# Altium PCB sustentationAvecPC.PcbDoc
Units mil, origin at the board's own origin, x right, y up, seen from the top; angles counter-clockwise.
Board outline 6300 x 3950 mil, 3 copper layers (Top Layer, Mid-Layer 1, Bottom Layer); 30 components, 24 nets, 106 pads, 0 vias.
Unrouted connection lines stored in the file: 68.
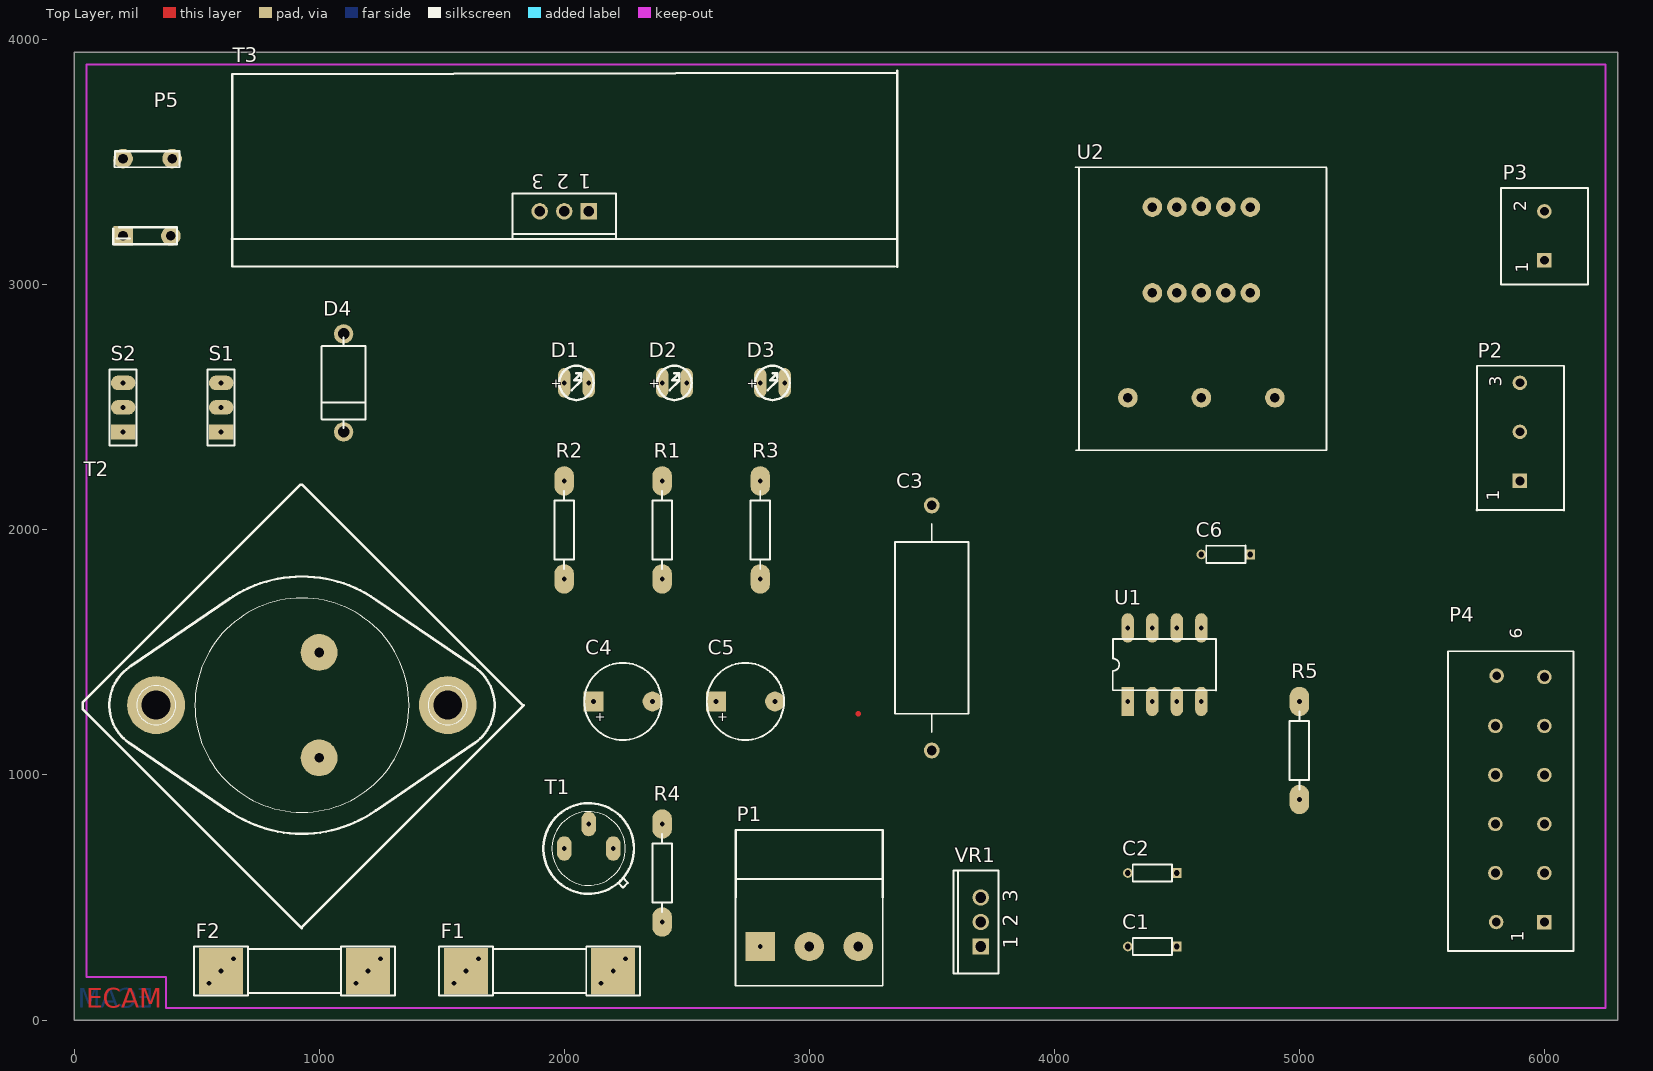
[diagram p0: Top Layer view]
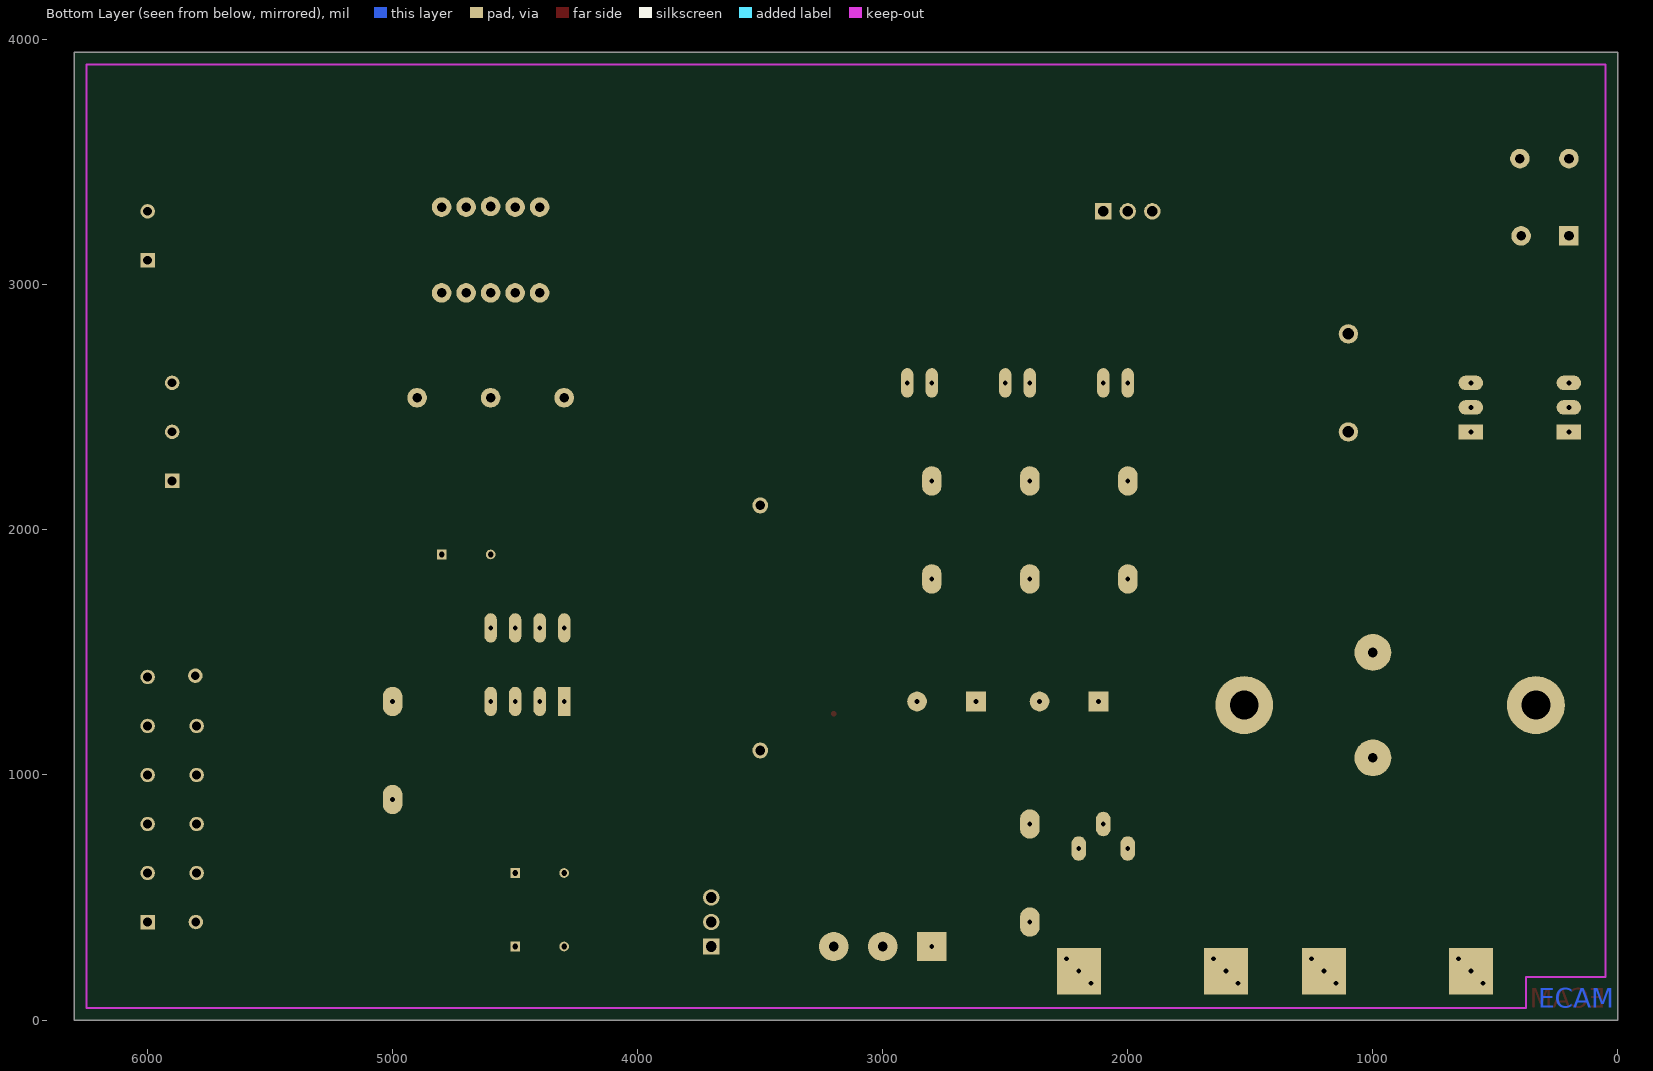
[diagram p1: Bottom Layer view, seen from below]
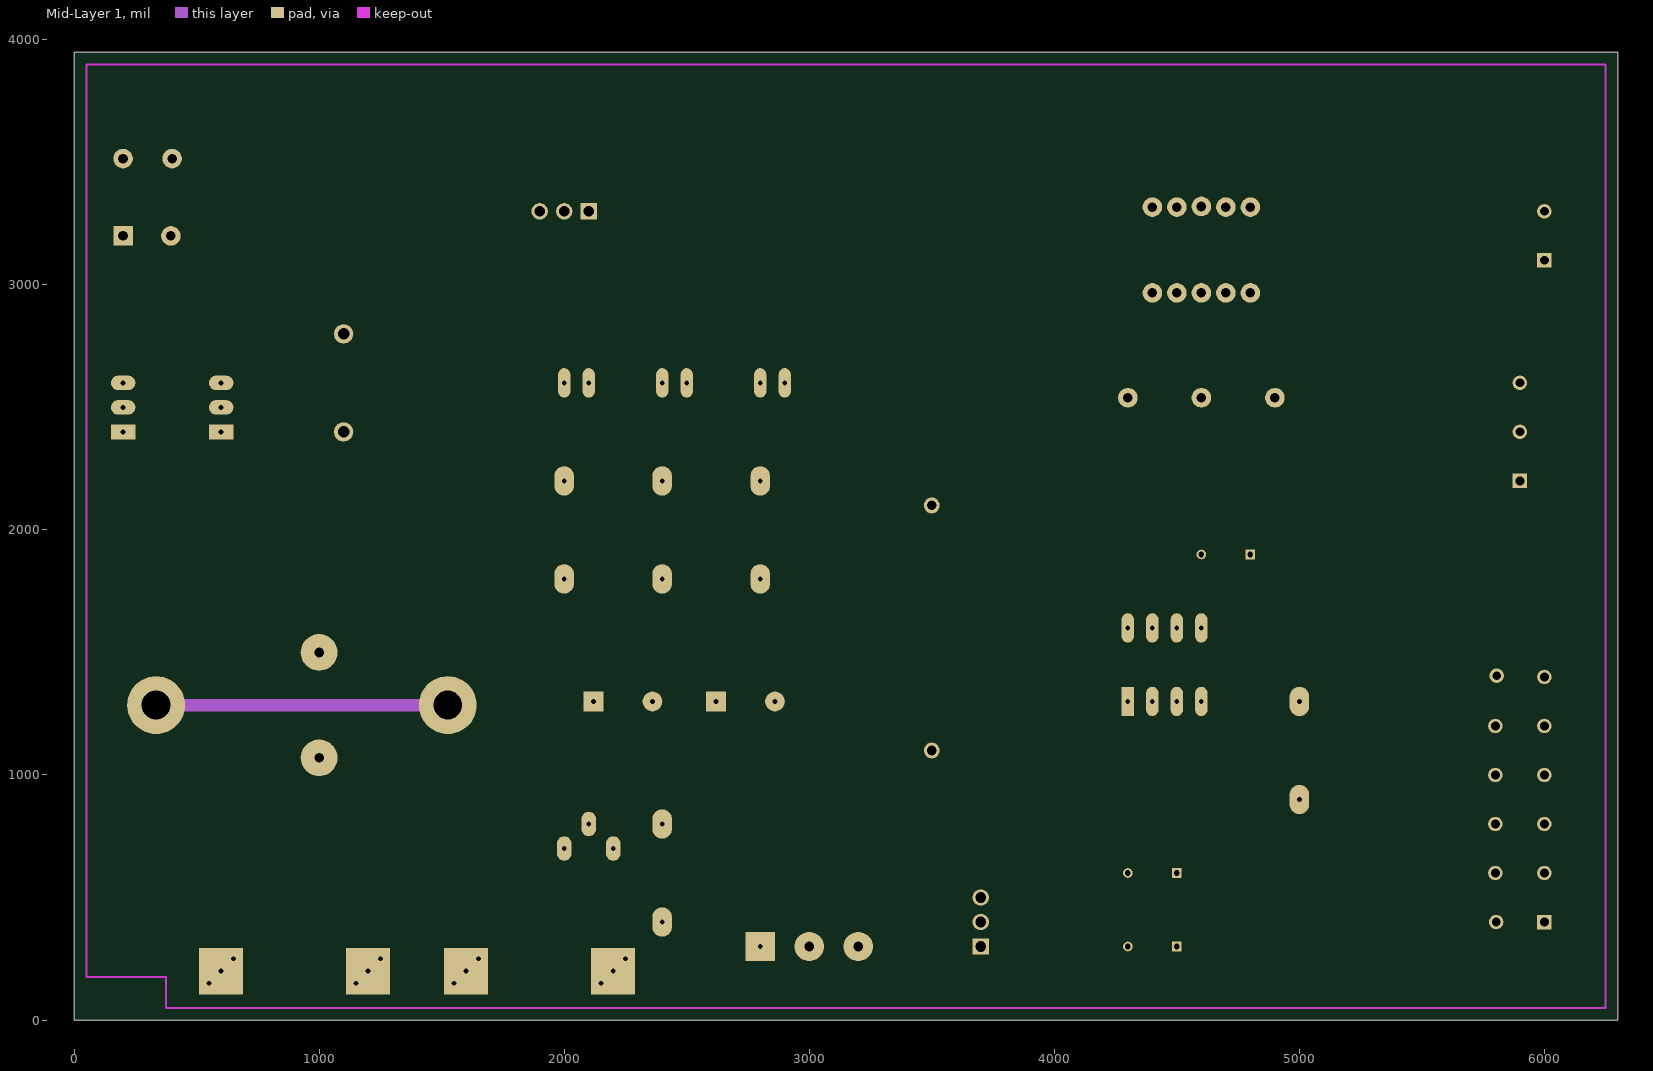
[diagram p2: Mid-Layer 1]

## Layer stack, top to bottom
Top Layer: signal copper 1.4
Dielectric: core 12.6, FR-4, Dk 4.8
Mid-Layer 1: signal copper 1.4
Dielectric: dielectric 12.6, FR-4, Dk 4.8
Bottom Layer: signal copper 1.4

## Board outline
0,0 0,3950 6300,3950 6300,0

## Design rules (kind name [scope] priority, off if disabled: settings)
Clearance "Clearance T DIP" [(IsTrack) vs (IsPad AND(
HasFootprint('DIP*')))] p1: gap=12
Clearance "Clearance PT" [(isTrack) vs (isPad)] p2: gap=24
Clearance "Clearance TT" [(isTrack) vs (isTrack)] p3: gap=24
Clearance [All] p4: gap=40
ComponentClearance [All] p1: gap=10 collisioncheckmode=0 verticalgap=10
HoleSize [All] p1: absolutevalues=TRUE maxlimit=21.65 minlimit=17.72 maxpercent=80.000 minpercent=20.000
PolygonConnect [All] p1: connectstyle=Relief reliefconductorwidth=10 reliefentries=4 polygonreliefangle="90 Angle"
RoutingCorners [All] p1: cornerstyle=45-Degree minsetback=100 maxsetback=1000
RoutingLayers [All] p1: top layer_v5=TRUE mid layer 1_v5=FALSE bottom layer_v5=TRUE
RoutingVias "ECAM Vias" [All] p1: holewidth=19.68 width=80 viastyle="Through Hole" minholewidth=17.72 minwidth=60 maxholewidth=21.65 maxwidth=120
SolderMaskExpansion [All] p1: expansion=4
TestPointUsage [All] p1: valid=0 allowmultiple=FALSE
Testpoint [All] p1: side=15 testpointundercomponent=TRUE minsize=40 maxsize=100 preferedsize=60 minholesize=0 maxholesize=40 preferedholesize=32 testpointgrid=1 style=1023 order=0-112345678
Width Width_GND [InNet('GND')] p1: maxlimit=1000 minlimit=24 preferedwidth=40
Width Width_VCC [InNet('VCC')] p2: maxlimit=1000 minlimit=24 preferedwidth=40
Width [All] p3: maxlimit=1000 minlimit=16 preferedwidth=24
14 further rules are at their usual default settings.

## Components (designator, comment, footprint, x,y, rotation, side; value= is the part's Value field where it differs from the comment)
C1 "Condensateur" Capa_100n 4500,300 r180 top
C2 "Condensateur" Capa_100n 4500,600 r180 top
C3 "Cond pol radial" AXIAL-1.0 3500,1600 r270 top
C4 "Cond pol radial" CAPPR_100u 2200,1300 r0 top
C5 "Cond pol  rad" CAPPR_100u 2700,1300 r0 top
C6 "Condensateur" Capa_100n 4800,1900 r180 top
D1 "LED" "Led 0.1" 2000,2600 r0 top
D2 "LED" "Led 0.1" 2400,2600 r0 top
D3 "LED" "Led 0.1" 2800,2600 r0 top
D4 "Diode 1N5408" DIODE-1N5408 1100,2600 r270 top
F1 "" FUSE-10 2200,200 r180 top
F2 "" FUSE-10 1200,200 r180 top
P1 "Alim +/-15V" CONVIS-3 2800,300 r0 top
P2 "Hall sensor" "connecteur capteur Hall" 5900,2200 r90 top
P3 "Connecteur PC Sortie de Commande" "connecteur PC Sorties command" 6000,3100 r90 top
P4 "Connecteur PC Entrees" "connecteur PC Entrées" 6000,400 r90 top
P5 "Sortie Electro-aimant" "connecteur 3A" 200,3200 r90 top
R1 "Résistance" AXIAL-0.4 2400,1800 r90 top
R2 "Résistance" AXIAL-0.4 2000,1800 r90 top
R3 "Résistance" AXIAL-0.4 2800,1800 r90 top
R4 "Résistance" AXIAL-0.4 2400,400 r90 top
R5 "Résistance" AXIAL-0.4 5000,900 r90 top
S1 "DIP Inverseur" SIP3 600,2400 r90 top
S2 "DIP Inverseur" SIP3 200,2400 r90 top
T1 "NPN" TO-5 2200,700 r0 top
T2 "NPN_Puissance" TO-3 1000,1500 r180 top
T3 "MOSFET-P" "TO-220 - Transistor" 2000,3300 r180 top
U1 "Op Amp" DIP8 4300,1300 r0 top
U2 "CapteurDeCourant" Sonde_Courant 4600,2900 r0 top
VR1 "7805" "TO-220 regulateur" 3700,400 r90 top

## Footprints (in the part's own frame and the unit in brackets; to place one, negate y for a bottom-side part, rotate by r counter-clockwise, add the part's x,y. Pads: shape width x height; smd on the part's side, far side on the other; paste and mask are expansions set on the pad)
AXIAL-0.4 [mil]
  oval 120x80 hole 19.68: 1(0,0) 2(400,0)
  silkscreen extent 40,-40 360,40
AXIAL-1.0 [mm] "Adjustable Magnetic-Core Inductor; 2 Leads"
  round 1.65 hole 1: 1(-12.7,0) 2(12.7,0)
  silkscreen extent -10.79,-3.81 10.79,3.81
Capa_100n [mm] "Connector; Header; 2 Position"
  rect 1x1 hole 0.6: 1(0,0)
  round 1 hole 0.6: 2(5.08,0)
  silkscreen extent 0.5,-0.91 4.57,0.89
CAPPR_100u [mil]
  rect 80.63x80.63 hole 19.68: 1(-80,0)
  round 80.63 hole 19.68: 2(160,0)
  silkscreen extent -118,-157 197,157
"connecteur 3A" [mil] "Connector; Header; 2 Position"
  rect 80x80 hole 39.37: 1(0,0)
  round 80 hole 39.37: 1(0,-195) 2(314.96,-200) 2(314.96,0)
  silkscreen extent -35,-230 346,40
"connecteur capteur Hall" [mm] "Connector; Header; 3x1 Position"
  rect 1.5x1.5 hole 0.9: 1(0,0)
  round 1.5 hole 0.9: 2(5.08,0) 3(10.16,0)
  silkscreen extent -3.06,-4.56 11.94,4.5
"connecteur PC Entrées" [mm] "Connector; Header; 6x2 Position"
  round 1.5 hole 0.9: 1(0,5) 2(5.08,0) 2(5.08,5.08) 3(10.16,0) 3(10.16,5.08) 4(15.24,0) 4(15.24,5.08) 5(20.32,0) 5(20.32,5.08) 6(25.4,0) 6(25.527,4.953)
  rect 1.5x1.5 hole 0.9: 1(0,0)
  silkscreen extent -3,-3 28.07,10
"connecteur PC Sorties command" [mm] "Connector; Header; 2x1 Position"
  rect 1.5x1.5 hole 0.9: 1(0,0)
  round 1.5 hole 0.9: 2(5.08,0)
  silkscreen extent -2.5,-4.5 7.5,4.5
CONVIS-3 [mil]
  rect 120x120 hole 19.68: 1(0,0)
  round 120 hole 39.37: 2(200,0) 3(400,0)
  silkscreen extent -100,-160 500,475
DIODE-1N5408 [mm] "Tunnel Diode - Dependent Source Model; 2 Leads"
  round 2 hole 1.2: 1(-5.08,0) 2(5.08,0)
  silkscreen extent -4.7,-2.29 4.7,2.29
DIP8 [mil]
  rect 50x120 hole 19.68: 1(0,0)
  oval 50x120 hole 19.68: 2(100,0) 3(200,0) 4(300,0) 5(300,300) 6(200,300) 7(100,300) 8(0,300)
  silkscreen extent -62,45 360,255
FUSE-10 [mil]
  rect 80x90 hole 19.68: 1(-50,-50) 1(50,50) 2(550,-50) 2(650,50)
  rect 180x190 hole 19.68: 1(0,0) 2(600,0)
  Mid-Layer 1 lines w50: 650,50 550,-50 ; 50,50 -50,-50
  silkscreen extent -110,-100 710,100
"Led 0.1" [mil]
  oval 50x120 hole 19.68: 1(0,0) 2(100,0)
  silkscreen extent -20,-70 120,70
SIP3 [mil]
  rect 60x100 hole 19.68: 1(0,0)
  oval 60x100 hole 19.68: 2(100,0) 3(200,0)
  silkscreen extent -55,-55 255,55
Sonde_Courant [mil] "Adjustable Magnetic-Core Inductor; 2 Leads"
  round 80 hole 39.37: 1(200,417.32) 2(100,417.32) 3(0,420) 4(-100,417.32) 5(-200,417.32) 6(-200,67.32) 7(-100,67.32) 8(0,67.32) 9(100,67.32) 10(200,67.32) 11(-300,-360.63) 12(0,-360.63) 13(300,-360.63)
  silkscreen extent -514,-575 512,580
TO-3 [mm]
  round 3.81 hole 1: 1(0,0) 2(0,10.922)
  round 6 hole 3: 3(-13.335,5.461) 3(16.891,5.461)
  Mid-Layer 1 lines w1.27: 16.891,5.461 -13.335,5.461
  silkscreen extent -21.22,-17.4 24.51,28.6
TO-5 [mil]
  oval 60x100 hole 19.68: 1(0,0) 2(-100,100) 3(-200,0)
  silkscreen extent -285,-185 85,185
"TO-220 - Transistor" [mm] "TO, Thru-Hole, Vertical, Heatsink Mounted; 3 In-Line Leads; Pitch 2.54 mm"
  rect 1.7x1.7 hole 1.1: 1(-2.54,0)
  round 1.7 hole 1.1: 2(0,0) 3(2.54,0)
  silkscreen extent -34.5,-14.56 34.5,5.76
"TO-220 regulateur" [mm] "TO, Thru-Hole, Vertical, Heatsink Mounted; 3 In-Line Leads; Pitch 2.54 mm"
  rect 1.7x1.7 hole 1.1: 1(-2.54,0)
  round 1.7 hole 1.1: 2(0,0) 3(2.54,0)
  silkscreen extent -5.35,-1.85 5.35,2.85

## Part data
C3 C4: "Condensateur polatisé"
C5: library part "Cond pol radial", "Condensateur polatisé"
D4: "3 Amp Medium Power Silicon Rectifier Diode"
F1 F2: library part Fusible, "Fusible"
P1 P2: library part "connecteur 3", "Header, 3-Pin"
P3 P5: library part "Connecteur 2", "Connecteur"
P4: library part "Header 6", "Header, 6-Pin"
R1 R2 R3 R4 R5: "Résistance standard"
S1 S2: "Inverseur"
T1 T2: "NPN Bipolar Transistor"
T3: "P-Channel MOSFET"
U1: "FET Operational Amplifier"
VR1: library part "Volt Reg", "Voltage Regulator"

## Nets (pads, with @x,y where several pads share a name; then routed paths per layer and width w, separated by ;. In a path a pad name is that pad's centre, name@x,y a point inside that pad or via, vN(x,y) a via of type N, cw(c..) or ccw(c..) an arc to the next point about the centre after c; other vN are vias at no path point)
GND: C1.2 C2.2 C3.2 C4.1 C5.1 C6.2 D1.2 D3.2 D4.1 P1.2 P2.3 P3.2 P4.2 P4.4 P4.6 P5.2 R1.1 VR1.2
NetC1_1: C1.1 C3.1 C6.1 F1.2 R2.2 T1.3 T2.3 T3.2 U1.7 U2.12 VR1.1
NetC2_1: C2.1 P2.1 R3.2 VR1.3
NetC4_2: C4.2 C5.2 D2.2 F2.2 U1.4 U2.11
NetD1_1: D1.1 R2.1
NetD2_1: D2.1 R1.2
NetD3_1: D3.1 R3.1
NetD4_2: D4.2 S2.2
NetF1_1: F1.1 P1.1
NetF2_1: F2.1 P1.3
NetP2_2: P2.2 P4.1
NetP3_1: P3.1 U1.3
NetP4_3: P4.3 P5.1 S2.1 U2.6
NetP4_5: P4.5 R5.2 U1.2 U2.13
NetR4_1: R4.1 T1.2
NetR4_2: R4.2 S1.3
NetS1_1: S1.1 T3.1
NetS1_2: S1.2 U1.6
NetT1_1: T1.1 T2.1
NetT2_2: T2.2 T3.3 U2.1
NetU2_2: U2.2 U2.10
NetU2_3: U2.3 U2.9
NetU2_4: U2.4 U2.8
NetU2_5: U2.5 U2.7
pads on no net: R5.1 S2.3 U1.1 U1.5 U1.8
copper on no net: | length 0

## Keep-outs
Keep-Out Layer:
  lines w8: 50,175 375,175 375,50 6250,50 6250,3900 50,3900 50,175

## Other copper
Top Layer:
  text "ECAM" at 50,50 h78.74
  text ".GTL" at 7764,-1528 h90
Bottom Layer:
  text "ECAM" at 325,50 h78.74
  text ".GBL" at 7764,-1528 h90
Multi-Layer:

## Silkscreen, mask and mechanical layers (free items; w line width, h text height)
Top Overlay:
  text ".GTO" at 7764,-1528 h90
Top Paste:
  text ".GTP" at 7764,-1528 h90
Bottom Paste:
  text ".GBP" at 7764,-1528 h90
Top Solder:
  text ".GTS" at 7764,-1528 h90
Bottom Solder:
  text ".GBS" at 7764,-1528 h90
Mechanical 1:
  the board outline again, w7.87
Mechanical 16:
  circle w3.94: c6670,-1515 r55.12
  lines w5: -2175,-225 -1975,-225 ; -2175,1675 -1975,1675 ; -2175,3575 -1975,3575 ; 305,-2125 305,-1925 ; 305,5275 305,5475 ; 2865,1515 3065,1515 ; 3180,-2125 3180,-1925 ; 3180,5275 3180,5475 ; 3815,-1625 8315,-1625 ; 3815,-1325 8315,-1325 ; 3815,-1025 5315,-1025 ; 5315,-1925 5315,-1325 5315,-725 ; 6055,-2125 6055,-1925 ; 6055,5275 6055,5475 ; 7415,-1925 7415,-1325 ; 8315,-235 8515,-235 ; 8315,3565 8515,3565 ; 3815,-1925 2415,-1925 2415,-725 3815,-725 ; 3815,-1925 8315,-1925 ; 3815,-1925 3815,-725 ; 3815,-725 5315,-725 ; 5315,-725 8315,-725 8315,-1925 ; 8315,-1925 8315,5275 -1975,5275 -1975,-1925 8315,-1925 ; -2175,-2125 -2175,5475 8515,5475 8515,-2125 -2175,-2125
  text "1" at -1143,5340 h70
  text "2" at 1717,5340 h70
  text "3" at 4597,5340 h70
  text "4" at 7467,5340 h70
  text "A" at -2100,4434 h70
  text "A" at 8390,4424 h70
  text "B" at -2100,2542 h70
  text "B" at 2940,2382 h70
  text "C" at -2100,632 h70
  text "C" at 8390,622 h70
  text "Concepteur du circuit :" at 3865,-825 h45
  text "TITRE :" at 5365,-825 h45
  text "ERM" at 4240,-975 h80
  text "Sustentation Piloté par PC" at 5625,-1095 h100
  text "Concepteur du PCB :" at 3865,-1120 h45
  text "ERM" at 2650,-1135 h240
  text "D" at -2100,-1258 h70
  text "D" at 8390,-1268 h70
  text "ERM" at 4235,-1280 h80
  text "Av. de la Renaiss. 30" at 2500,-1400 h60
  text "Date :" at 3865,-1425 h45
  text "PART NO.:" at 5365,-1425 h45
  text "Layer :" at 7465,-1425 h45
  text ".Print_Date" at 4255,-1460 h70
  text "1" at 5370,-1545 h60
  text "C" at 6645,-1545 h60
  text ".Print_Time" at 4260,-1590 h70
  text "1000 Bruxelles" at 2720,-1625 h60
  text "Nom du fichier :" at 3865,-1725 h45
  text "DWG NO:" at 5365,-1725 h45
  text ".Print_Scale" at 7625,-1805 h40
  text ".Printout_Name" at 5515,-1840 h60
  text ".Pcb_File_Name_No_Path" at 3915,-1845 h70
  text "1" at -1143,-2060 h70
  text "2" at 1717,-2060 h70
  text "3" at 4597,-2060 h70
  text "4" at 7467,-2060 h70

## Text inside footprints (layer, text, board x,y; h text height)
C4: Top Overlay "+" at 2125,1220 h39.37
C5: Top Overlay "+" at 2625,1220 h39.37
D1: Top Overlay "+" at 1945,2580 h39.37
D2: Top Overlay "+" at 2345,2580 h39.37
D3: Top Overlay "+" at 2745,2580 h39.37
P2: Top Overlay "3" at 5825,2585 h50 r90; Top Overlay "1" at 5815,2120 h50 r90
P3: Top Overlay "2" at 5925,3300 h50 r90; Top Overlay "1" at 5935,3050 h50 r90
P4: Top Overlay "6" at 5910,1555 h50 r90; Top Overlay "1" at 5915,320 h50 r90
T3: Top Overlay "3" at 1919.69,3450.59 h59.06 r180; Top Overlay "2" at 2019.69,3450.59 h59.06 r180; Top Overlay "1" at 2109.84,3450.59 h59.06 r180
VR1: Top Overlay "3" at 3850.59,480.32 h59.06 r90; Top Overlay "2" at 3850.59,380.32 h59.06 r90; Top Overlay "1" at 3850.59,290.16 h59.06 r90